# EAGLE board eib-64_panel (EAGLE 9.5.1), part 1 of 5
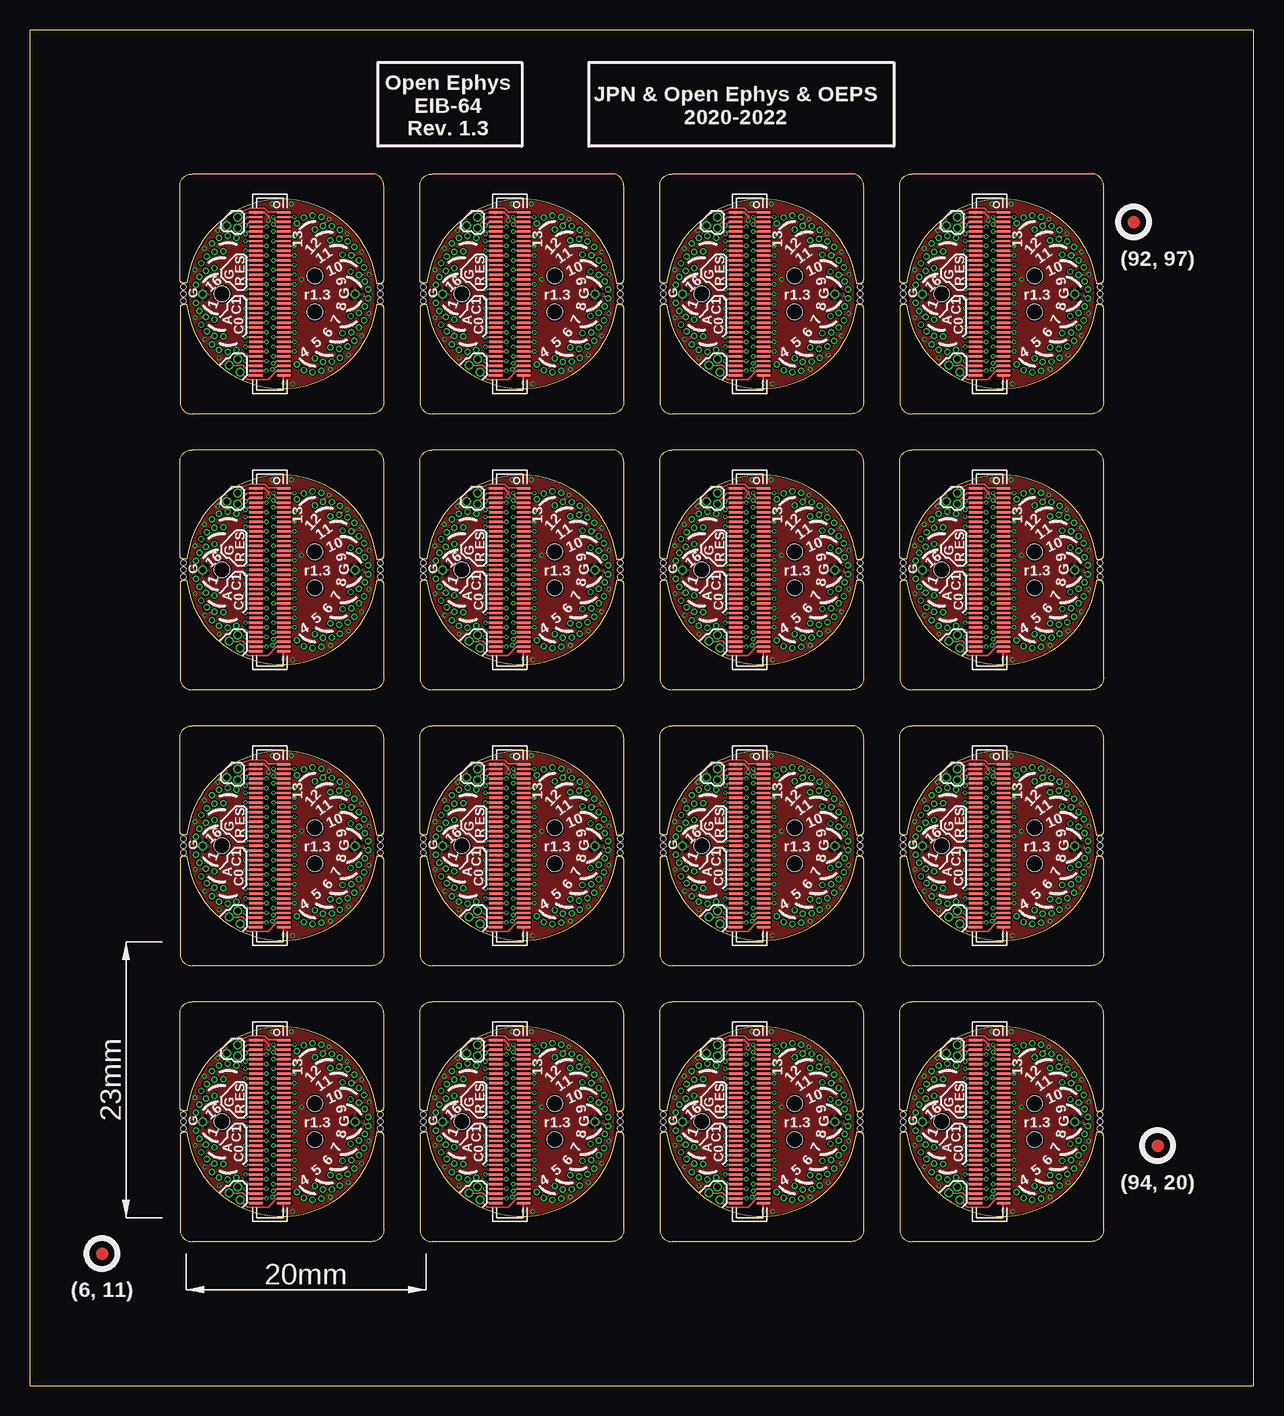
[diagram p0: board, top side]
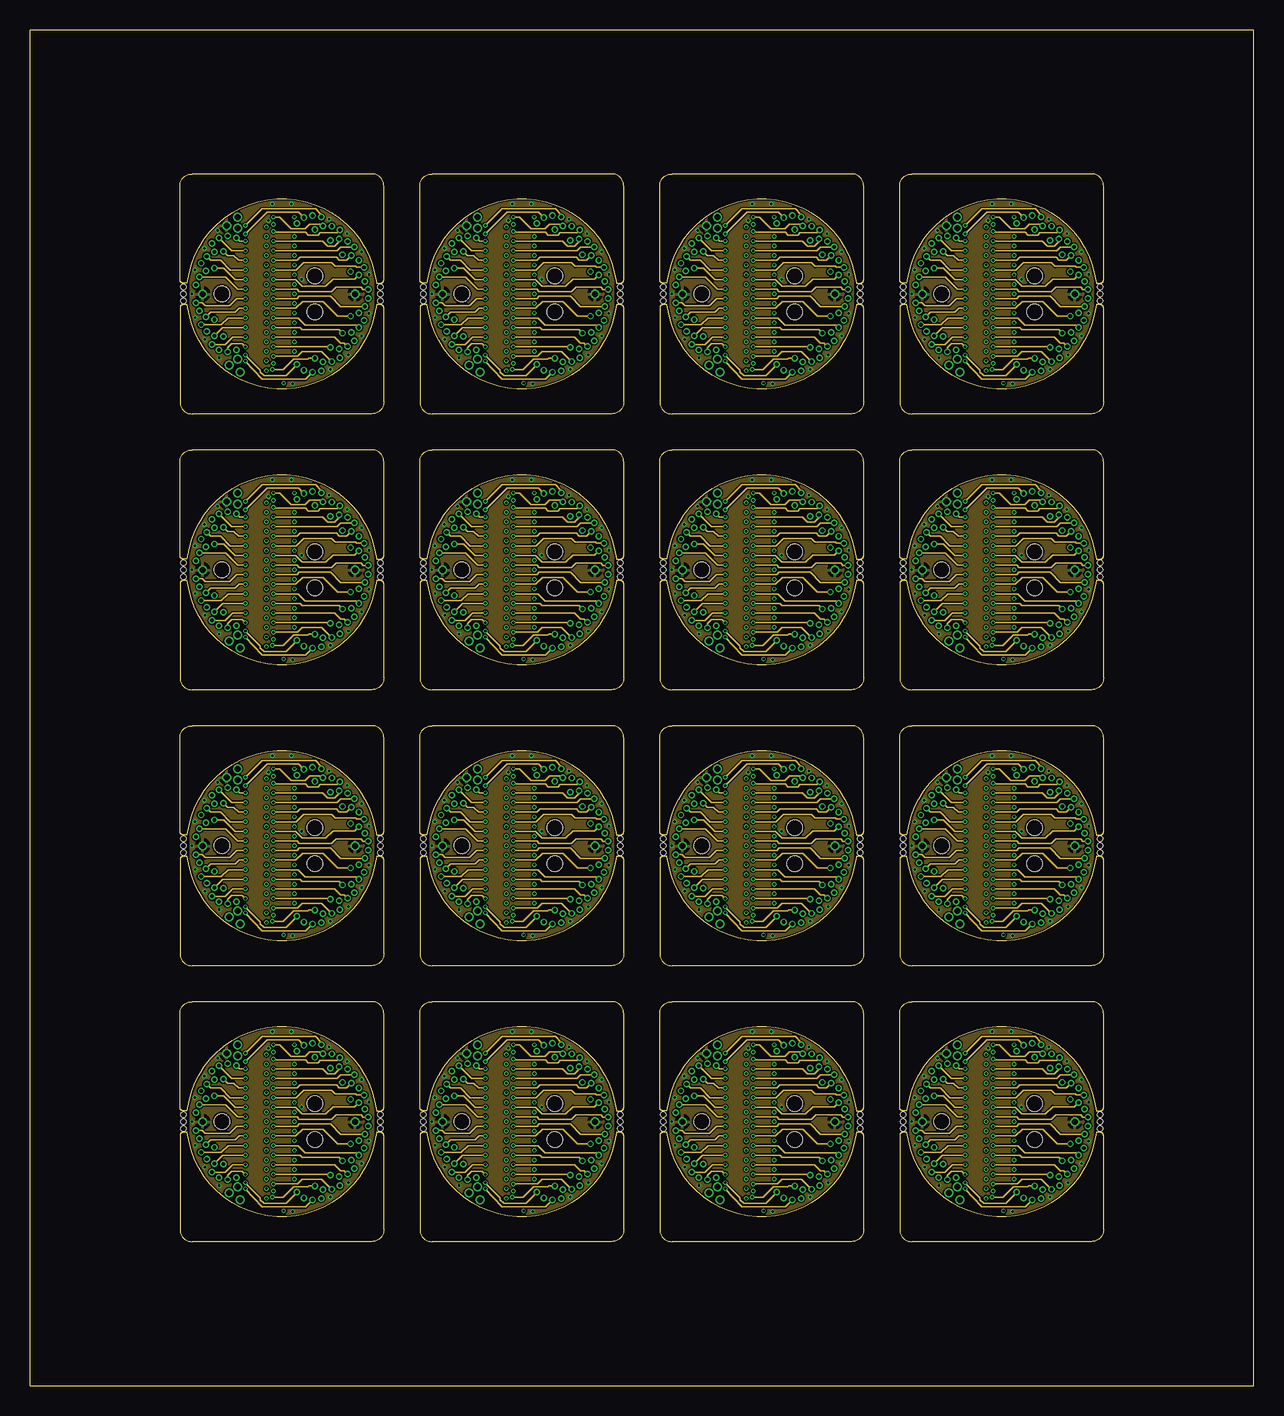
[diagram p1: board, inner layer Route2]
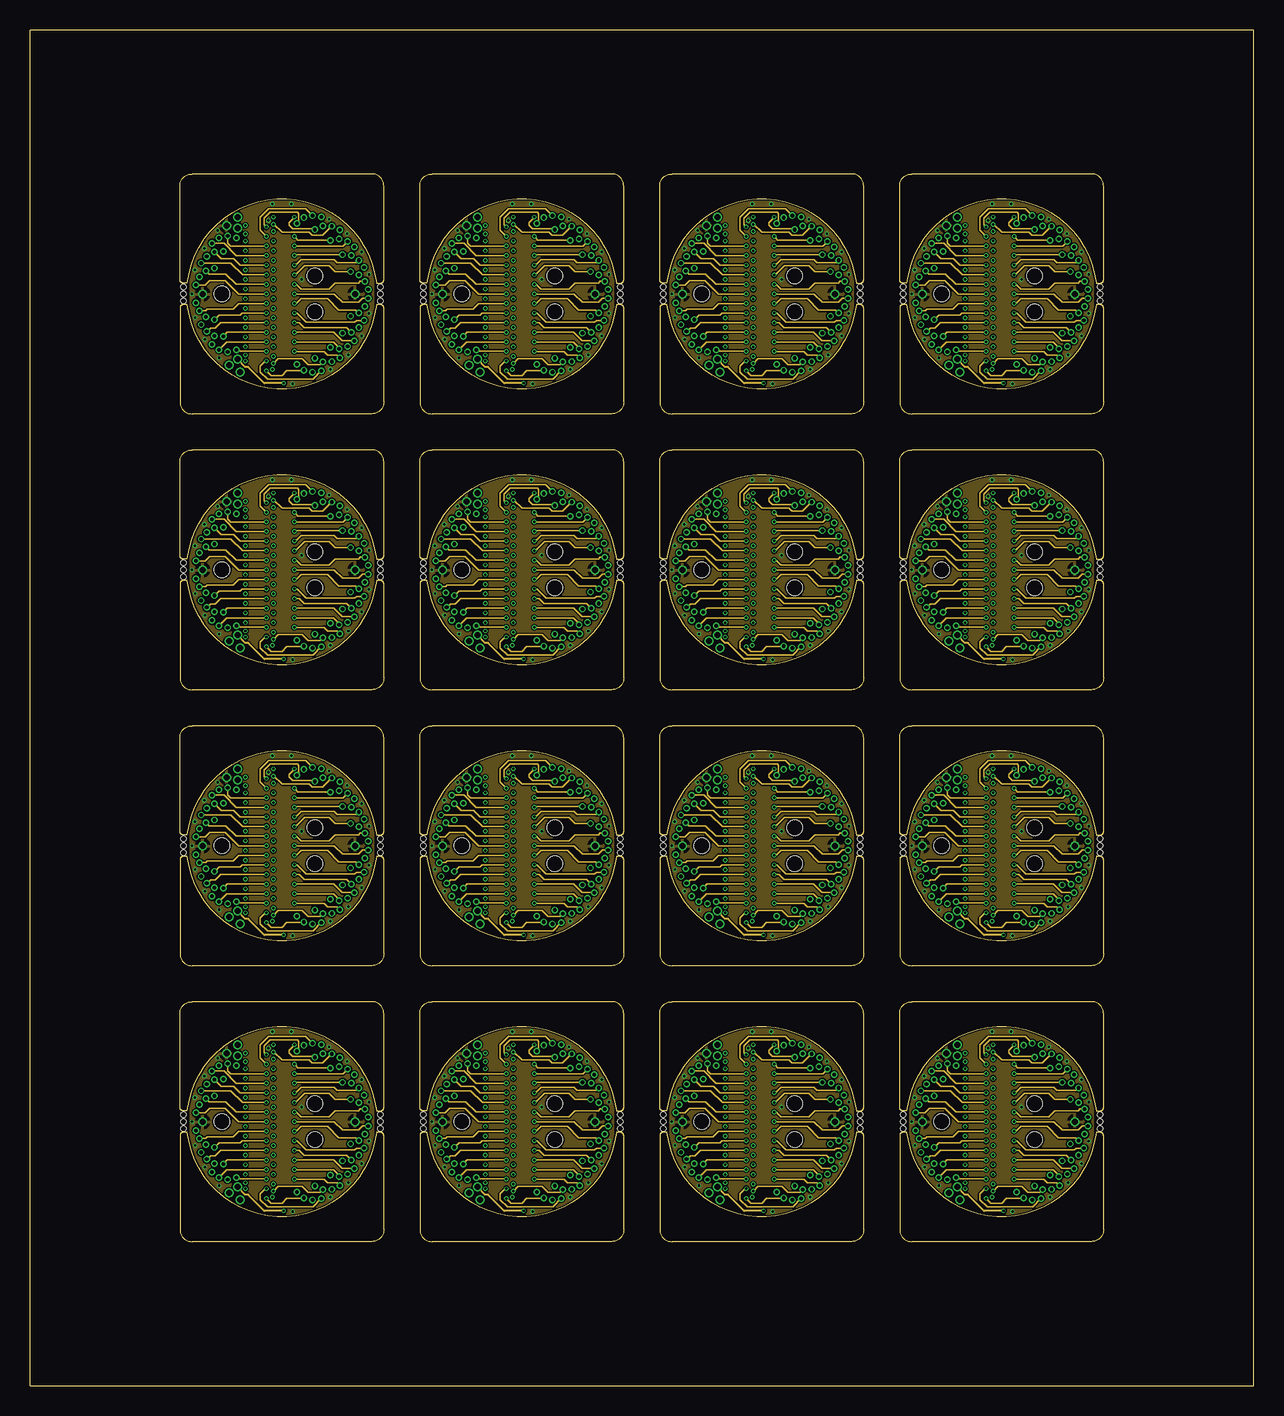
[diagram p2: board, inner layer Route15]
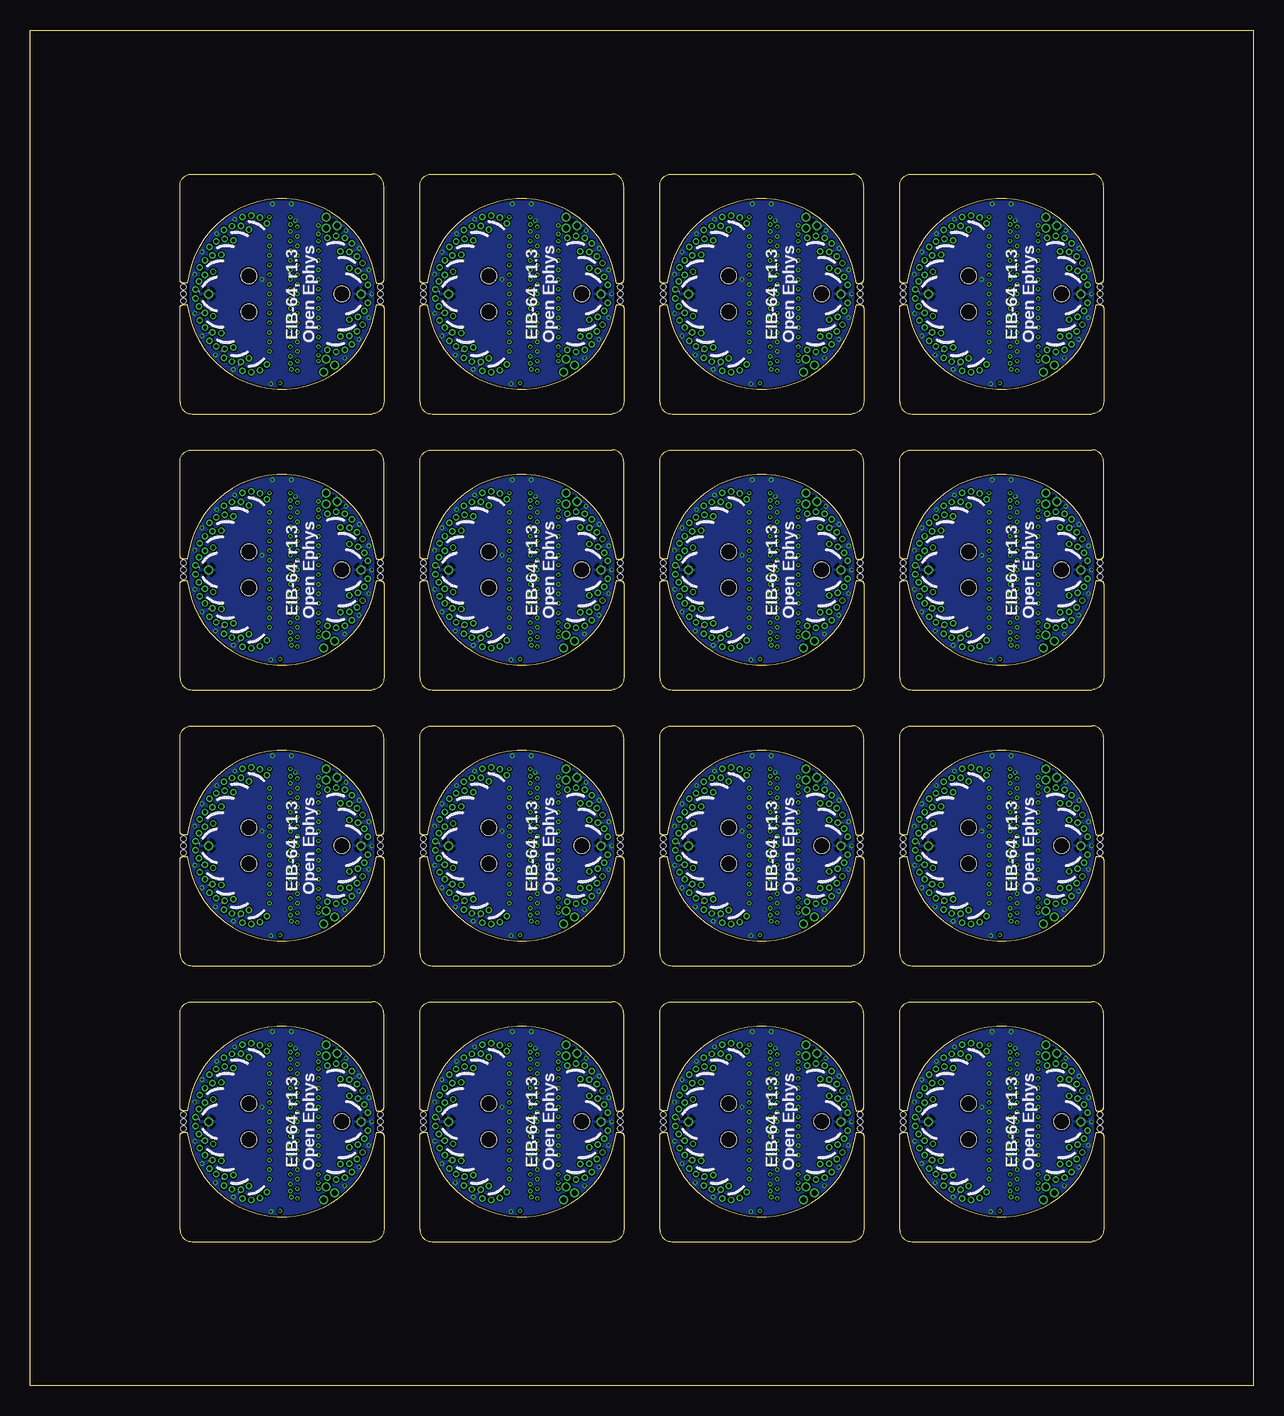
[diagram p3: board, bottom side, seen from below]

Size 102 x 113 mm. Coordinates in mm from the lower left corner, seen from the top.
Outline: 324 segments
Copper layers (1+2*15+16): Top 0.035mm / dielectric 1.5mm / Route2 0.035mm / dielectric 0.15mm / Route15 0.035mm / dielectric 0.2mm / Bottom 0.035mm
Design rules "pcb-cart-standard-4-layer *": minimum track width 3mil, minimum drill 6mil, track to track 4mil, track to pad 4mil, pad to pad 4mil, via to via 4mil, smd to smd 4mil, copper to edge 6mil, drill to drill 6mil, minimum pad ring 3mil, minimum via ring 3mil, stop-mask expansion 2mil, vias tented up to drill 20mil, thermal gap 10mil
Holes 0.45 mm at 12.8,22.6 12.8,22 12.8,21.4 29.2,21.4 29.2,22 29.2,22.6 32.8,22.6 32.8,22 32.8,21.4 49.2,21.4 49.2,22 49.2,22.6 52.8,22.6 52.8,22 52.8,21.4 69.2,21.4 69.2,22 69.2,22.6 72.8,22.6 72.8,22 72.8,21.4 89.2,21.4 89.2,22 89.2,22.6 32.8,45.6 32.8,45 32.8,44.4 49.2,44.4 49.2,45 49.2,45.6 52.8,45.6 52.8,45 52.8,44.4 69.2,44.4 69.2,45 69.2,45.6 72.8,45.6 72.8,45 72.8,44.4 89.2,44.4 89.2,45 89.2,45.6 32.8,68.6 32.8,68 32.8,67.4 49.2,67.4 49.2,68 49.2,68.6 52.8,68.6 52.8,68 52.8,67.4 69.2,67.4 69.2,68 69.2,68.6 72.8,68.6 72.8,68 72.8,67.4 89.2,67.4 89.2,68 89.2,68.6 32.8,91.6 32.8,91 32.8,90.4 49.2,90.4 49.2,91 49.2,91.6 52.8,91.6 52.8,91 52.8,90.4 69.2,90.4 69.2,91 69.2,91.6 72.8,91.6 72.8,91 72.8,90.4 89.2,90.4 89.2,91 89.2,91.6 12.8,45.6 12.8,45 12.8,44.4 29.2,44.4 29.2,45 29.2,45.6 12.8,68.6 12.8,68 12.8,67.4 29.2,67.4 29.2,68 29.2,68.6 12.8,91.6 12.8,91 12.8,90.4 29.2,90.4 29.2,91 29.2,91.6
Holes 1.3 mm at 23.75,20.5 23.75,23.5 16,22 43.75,20.5 43.75,23.5 36,22 63.75,20.5 63.75,23.5 56,22 83.75,20.5 83.75,23.5 76,22 43.75,43.5 43.75,46.5 36,45 63.75,43.5 63.75,46.5 56,45 83.75,43.5 83.75,46.5 76,45 43.75,66.5 43.75,69.5 36,68 63.75,66.5 63.75,69.5 56,68 83.75,66.5 83.75,69.5 76,68 43.75,89.5 43.75,92.5 36,91 63.75,89.5 63.75,92.5 56,91 83.75,89.5 83.75,92.5 76,91 23.75,43.5 23.75,46.5 16,45 23.75,66.5 23.75,69.5 16,68 23.75,89.5 23.75,92.5 16,91
tKeepout: area 13,14 to 29,30; area 33,14 to 49,30; area 53,14 to 69,30; area 73,14 to 89,30; area 33,37 to 49,53; area 53,37 to 69,53; area 73,37 to 89,53; area 33,60 to 49,76; area 53,60 to 69,76; area 73,60 to 89,76; area 33,83 to 49,99; area 53,83 to 69,99; 4 more areas

## Footprints (pad centres in the part's own frame; a part is rotated, then mirrored left to right if it is on the bottom)
GOLDPIN_0.5ID_0.7OD = drill 0.5 pad 0.7: P$1 0,0
DF40-70REC = smd 0.2 x 1.14: 1 -6.8,1.17; 2 -6.4,1.17; 3 -6,1.17; 4 -5.6,1.17; 5 -5.2,1.17; 6 -4.8,1.17; 7 -4.4,1.17; 8 -4,1.17; 9 -3.6,1.17; 10 -3.2,1.17; 11 -2.8,1.17; 12 -2.4,1.17; 13 -2,1.17; 14 -1.6,1.17; 15 -1.2,1.17; 16 -0.8,1.17; 17 -0.4,1.17; 18 0,1.17; 19 0.4,1.17; 20 0.8,1.17; 21 1.2,1.17; 22 1.6,1.17; 23 2,1.17; 24 2.4,1.17; 25 2.8,1.17; 26 3.2,1.17; 27 3.6,1.17; 28 4,1.17; 29 4.4,1.17; 30 4.8,1.17; 31 5.2,1.17; 32 5.6,1.17; 33 6,1.17; 34 6.4,1.17; 35 6.8,1.17; 36 6.8,-1.17; 37 6.4,-1.17; 38 6,-1.17; 39 5.6,-1.17; 40 5.2,-1.17; 41 4.8,-1.17; 42 4.4,-1.17; 43 4,-1.17; 44 3.6,-1.17; 45 3.2,-1.17; 46 2.8,-1.17; 47 2.4,-1.17; 48 2,-1.17; 49 1.6,-1.17; 50 1.2,-1.17; 51 0.8,-1.17; 52 0.4,-1.17; 53 0,-1.17; 54 -0.4,-1.17; 55 -0.8,-1.17; 56 -1.2,-1.17; 57 -1.6,-1.17; 58 -2,-1.17; 59 -2.4,-1.17; 60 -2.8,-1.17; 61 -3.2,-1.17; 62 -3.6,-1.17; 63 -4,-1.17; 64 -4.4,-1.17; 65 -4.8,-1.17; 66 -5.2,-1.17; 67 -5.6,-1.17; 68 -6,-1.17; 69 -6.4,-1.17; 70 -6.8,-1.17
TETRODE_0.3ID_LINEAR_MOUSE = drill 0.305 pad 0.533: 0 2,5.68; 1 1.76,6.38; 2 1.23,6.9; 3 0.55,7.18

## Placement (x,y rotation side)
AN  LRG_GP  [GOLDPIN_0.5ID_0.7OD]  16.6,16.05 90 top
AN1  LRG_GP  [GOLDPIN_0.5ID_0.7OD]  36.6,16.05 90 top
AN2  LRG_GP  [GOLDPIN_0.5ID_0.7OD]  56.6,16.05 90 top
AN3  LRG_GP  [GOLDPIN_0.5ID_0.7OD]  76.6,16.05 90 top
AN4  LRG_GP  [GOLDPIN_0.5ID_0.7OD]  16.6,39.05 90 top
AN5  LRG_GP  [GOLDPIN_0.5ID_0.7OD]  36.6,39.05 90 top
AN6  LRG_GP  [GOLDPIN_0.5ID_0.7OD]  56.6,39.05 90 top
AN7  LRG_GP  [GOLDPIN_0.5ID_0.7OD]  76.6,39.05 90 top
AN8  LRG_GP  [GOLDPIN_0.5ID_0.7OD]  16.6,62.05 90 top
AN9  LRG_GP  [GOLDPIN_0.5ID_0.7OD]  36.6,62.05 90 top
AN10  LRG_GP  [GOLDPIN_0.5ID_0.7OD]  56.6,62.05 90 top
AN11  LRG_GP  [GOLDPIN_0.5ID_0.7OD]  76.6,62.05 90 top
AN12  LRG_GP  [GOLDPIN_0.5ID_0.7OD]  16.6,85.05 90 top
AN13  LRG_GP  [GOLDPIN_0.5ID_0.7OD]  36.6,85.05 90 top
AN14  LRG_GP  [GOLDPIN_0.5ID_0.7OD]  56.6,85.05 90 top
AN15  LRG_GP  [GOLDPIN_0.5ID_0.7OD]  76.6,85.05 90 top
CAT0  LRG_GP  [GOLDPIN_0.5ID_0.7OD]  17.51,15.49 90 top
CAT1  LRG_GP  [GOLDPIN_0.5ID_0.7OD]  17.3,16.58 90 top
CAT2  LRG_GP  [GOLDPIN_0.5ID_0.7OD]  37.51,15.49 90 top
CAT3  LRG_GP  [GOLDPIN_0.5ID_0.7OD]  37.3,16.58 90 top
CAT4  LRG_GP  [GOLDPIN_0.5ID_0.7OD]  57.51,15.49 90 top
CAT5  LRG_GP  [GOLDPIN_0.5ID_0.7OD]  57.3,16.58 90 top
CAT6  LRG_GP  [GOLDPIN_0.5ID_0.7OD]  77.51,15.49 90 top
CAT7  LRG_GP  [GOLDPIN_0.5ID_0.7OD]  77.3,16.58 90 top
CAT8  LRG_GP  [GOLDPIN_0.5ID_0.7OD]  17.51,38.49 90 top
CAT9  LRG_GP  [GOLDPIN_0.5ID_0.7OD]  17.3,39.58 90 top
CAT10  LRG_GP  [GOLDPIN_0.5ID_0.7OD]  37.51,38.49 90 top
CAT11  LRG_GP  [GOLDPIN_0.5ID_0.7OD]  37.3,39.58 90 top
CAT12  LRG_GP  [GOLDPIN_0.5ID_0.7OD]  57.51,38.49 90 top
CAT13  LRG_GP  [GOLDPIN_0.5ID_0.7OD]  57.3,39.58 90 top
CAT14  LRG_GP  [GOLDPIN_0.5ID_0.7OD]  77.51,38.49 90 top
CAT15  LRG_GP  [GOLDPIN_0.5ID_0.7OD]  77.3,39.58 90 top
CAT16  LRG_GP  [GOLDPIN_0.5ID_0.7OD]  17.51,61.49 90 top
CAT17  LRG_GP  [GOLDPIN_0.5ID_0.7OD]  17.3,62.58 90 top
CAT18  LRG_GP  [GOLDPIN_0.5ID_0.7OD]  37.51,61.49 90 top
CAT19  LRG_GP  [GOLDPIN_0.5ID_0.7OD]  37.3,62.58 90 top
CAT20  LRG_GP  [GOLDPIN_0.5ID_0.7OD]  57.51,61.49 90 top
CAT21  LRG_GP  [GOLDPIN_0.5ID_0.7OD]  57.3,62.58 90 top
CAT22  LRG_GP  [GOLDPIN_0.5ID_0.7OD]  77.51,61.49 90 top
CAT23  LRG_GP  [GOLDPIN_0.5ID_0.7OD]  77.3,62.58 90 top
CAT24  LRG_GP  [GOLDPIN_0.5ID_0.7OD]  17.51,84.49 90 top
CAT25  LRG_GP  [GOLDPIN_0.5ID_0.7OD]  17.3,85.58 90 top
CAT26  LRG_GP  [GOLDPIN_0.5ID_0.7OD]  37.51,84.49 90 top
CAT27  LRG_GP  [GOLDPIN_0.5ID_0.7OD]  37.3,85.58 90 top
CAT28  LRG_GP  [GOLDPIN_0.5ID_0.7OD]  57.51,84.49 90 top
CAT29  LRG_GP  [GOLDPIN_0.5ID_0.7OD]  57.3,85.58 90 top
CAT30  LRG_GP  [GOLDPIN_0.5ID_0.7OD]  77.51,84.49 90 top
CAT31  LRG_GP  [GOLDPIN_0.5ID_0.7OD]  77.3,85.58 90 top
E$1  [FIDUCIAL]  94,20 0 top
E$2  [FIDUCIAL]  92,97 0 top
E$4  [FIDUCIAL]  6,11 0 top
ESTIM  LRG_GP  [GOLDPIN_0.5ID_0.7OD]  17.3,28.4 90 top
ESTIM1  LRG_GP  [GOLDPIN_0.5ID_0.7OD]  37.3,28.4 90 top
ESTIM2  LRG_GP  [GOLDPIN_0.5ID_0.7OD]  57.3,28.4 90 top
ESTIM3  LRG_GP  [GOLDPIN_0.5ID_0.7OD]  77.3,28.4 90 top
ESTIM4  LRG_GP  [GOLDPIN_0.5ID_0.7OD]  17.3,51.4 90 top
ESTIM5  LRG_GP  [GOLDPIN_0.5ID_0.7OD]  37.3,51.4 90 top
ESTIM6  LRG_GP  [GOLDPIN_0.5ID_0.7OD]  57.3,51.4 90 top
ESTIM7  LRG_GP  [GOLDPIN_0.5ID_0.7OD]  77.3,51.4 90 top
ESTIM8  LRG_GP  [GOLDPIN_0.5ID_0.7OD]  17.3,74.4 90 top
ESTIM9  LRG_GP  [GOLDPIN_0.5ID_0.7OD]  37.3,74.4 90 top
ESTIM10  LRG_GP  [GOLDPIN_0.5ID_0.7OD]  57.3,74.4 90 top
ESTIM11  LRG_GP  [GOLDPIN_0.5ID_0.7OD]  77.3,74.4 90 top
ESTIM12  LRG_GP  [GOLDPIN_0.5ID_0.7OD]  17.3,97.4 90 top
ESTIM13  LRG_GP  [GOLDPIN_0.5ID_0.7OD]  37.3,97.4 90 top
ESTIM14  LRG_GP  [GOLDPIN_0.5ID_0.7OD]  57.3,97.4 90 top
ESTIM15  LRG_GP  [GOLDPIN_0.5ID_0.7OD]  77.3,97.4 90 top
GND0  LRG_GP  [GOLDPIN_0.5ID_0.7OD]  14.4,22 90 top
GND1  LRG_GP  [GOLDPIN_0.5ID_0.7OD]  27.1,22 90 top
GND2  LRG_GP  [GOLDPIN_0.5ID_0.7OD]  34.4,22 90 top
GND3  LRG_GP  [GOLDPIN_0.5ID_0.7OD]  47.1,22 90 top
GND4  LRG_GP  [GOLDPIN_0.5ID_0.7OD]  54.4,22 90 top
GND5  LRG_GP  [GOLDPIN_0.5ID_0.7OD]  67.1,22 90 top
GND6  LRG_GP  [GOLDPIN_0.5ID_0.7OD]  74.4,22 90 top
GND7  LRG_GP  [GOLDPIN_0.5ID_0.7OD]  87.1,22 90 top
GND8  LRG_GP  [GOLDPIN_0.5ID_0.7OD]  14.4,45 90 top
GND9  LRG_GP  [GOLDPIN_0.5ID_0.7OD]  27.1,45 90 top
GND10  LRG_GP  [GOLDPIN_0.5ID_0.7OD]  34.4,45 90 top
GND11  LRG_GP  [GOLDPIN_0.5ID_0.7OD]  47.1,45 90 top
GND12  LRG_GP  [GOLDPIN_0.5ID_0.7OD]  54.4,45 90 top
GND13  LRG_GP  [GOLDPIN_0.5ID_0.7OD]  67.1,45 90 top
GND14  LRG_GP  [GOLDPIN_0.5ID_0.7OD]  74.4,45 90 top
GND15  LRG_GP  [GOLDPIN_0.5ID_0.7OD]  87.1,45 90 top
GND16  LRG_GP  [GOLDPIN_0.5ID_0.7OD]  14.4,68 90 top
GND17  LRG_GP  [GOLDPIN_0.5ID_0.7OD]  27.1,68 90 top
GND18  LRG_GP  [GOLDPIN_0.5ID_0.7OD]  34.4,68 90 top
GND19  LRG_GP  [GOLDPIN_0.5ID_0.7OD]  47.1,68 90 top
GND20  LRG_GP  [GOLDPIN_0.5ID_0.7OD]  54.4,68 90 top
GND21  LRG_GP  [GOLDPIN_0.5ID_0.7OD]  67.1,68 90 top
GND22  LRG_GP  [GOLDPIN_0.5ID_0.7OD]  74.4,68 90 top
GND23  LRG_GP  [GOLDPIN_0.5ID_0.7OD]  87.1,68 90 top
GND24  LRG_GP  [GOLDPIN_0.5ID_0.7OD]  14.4,91 90 top
GND25  LRG_GP  [GOLDPIN_0.5ID_0.7OD]  27.1,91 90 top
GND26  LRG_GP  [GOLDPIN_0.5ID_0.7OD]  34.4,91 90 top
GND27  LRG_GP  [GOLDPIN_0.5ID_0.7OD]  47.1,91 90 top
GND28  LRG_GP  [GOLDPIN_0.5ID_0.7OD]  54.4,91 90 top
GND29  LRG_GP  [GOLDPIN_0.5ID_0.7OD]  67.1,91 90 top
GND30  LRG_GP  [GOLDPIN_0.5ID_0.7OD]  74.4,91 90 top
GND31  LRG_GP  [GOLDPIN_0.5ID_0.7OD]  87.1,91 90 top
J1  DF40-REC  [DF40-70REC]  20,22 270 top
J2  DF40-REC  [DF40-70REC]  40,22 270 top
J3  DF40-REC  [DF40-70REC]  60,22 270 top
J4  DF40-REC  [DF40-70REC]  80,22 270 top
J5  DF40-REC  [DF40-70REC]  20,45 270 top
J6  DF40-REC  [DF40-70REC]  40,45 270 top
J7  DF40-REC  [DF40-70REC]  60,45 270 top
J8  DF40-REC  [DF40-70REC]  80,45 270 top
J9  DF40-REC  [DF40-70REC]  20,68 270 top
J10  DF40-REC  [DF40-70REC]  40,68 270 top
J11  DF40-REC  [DF40-70REC]  60,68 270 top
J12  DF40-REC  [DF40-70REC]  80,68 270 top
J13  DF40-REC  [DF40-70REC]  20,91 270 top
J14  DF40-REC  [DF40-70REC]  40,91 270 top
J15  DF40-REC  [DF40-70REC]  60,91 270 top
J16  DF40-REC  [DF40-70REC]  80,91 270 top
REF  LRG_GP  [GOLDPIN_0.5ID_0.7OD]  17.3,27.5 90 top
REF1  LRG_GP  [GOLDPIN_0.5ID_0.7OD]  37.3,27.5 90 top
REF2  LRG_GP  [GOLDPIN_0.5ID_0.7OD]  57.3,27.5 90 top
REF3  LRG_GP  [GOLDPIN_0.5ID_0.7OD]  77.3,27.5 90 top
REF4  LRG_GP  [GOLDPIN_0.5ID_0.7OD]  17.3,50.5 90 top
REF5  LRG_GP  [GOLDPIN_0.5ID_0.7OD]  37.3,50.5 90 top
REF6  LRG_GP  [GOLDPIN_0.5ID_0.7OD]  57.3,50.5 90 top
REF7  LRG_GP  [GOLDPIN_0.5ID_0.7OD]  77.3,50.5 90 top
REF8  LRG_GP  [GOLDPIN_0.5ID_0.7OD]  17.3,73.5 90 top
REF9  LRG_GP  [GOLDPIN_0.5ID_0.7OD]  37.3,73.5 90 top
REF10  LRG_GP  [GOLDPIN_0.5ID_0.7OD]  57.3,73.5 90 top
REF11  LRG_GP  [GOLDPIN_0.5ID_0.7OD]  77.3,73.5 90 top
REF12  LRG_GP  [GOLDPIN_0.5ID_0.7OD]  17.3,96.5 90 top
REF13  LRG_GP  [GOLDPIN_0.5ID_0.7OD]  37.3,96.5 90 top
REF14  LRG_GP  [GOLDPIN_0.5ID_0.7OD]  57.3,96.5 90 top
REF15  LRG_GP  [GOLDPIN_0.5ID_0.7OD]  77.3,96.5 90 top
SHLD_A  LRG_GP  [GOLDPIN_0.5ID_0.7OD]  16.4,27.7 90 top
SHLD_A1  LRG_GP  [GOLDPIN_0.5ID_0.7OD]  36.4,27.7 90 top
SHLD_A2  LRG_GP  [GOLDPIN_0.5ID_0.7OD]  56.4,27.7 90 top
SHLD_A3  LRG_GP  [GOLDPIN_0.5ID_0.7OD]  76.4,27.7 90 top
SHLD_A4  LRG_GP  [GOLDPIN_0.5ID_0.7OD]  16.4,50.7 90 top
SHLD_A5  LRG_GP  [GOLDPIN_0.5ID_0.7OD]  36.4,50.7 90 top
SHLD_A6  LRG_GP  [GOLDPIN_0.5ID_0.7OD]  56.4,50.7 90 top
SHLD_A7  LRG_GP  [GOLDPIN_0.5ID_0.7OD]  76.4,50.7 90 top
SHLD_A8  LRG_GP  [GOLDPIN_0.5ID_0.7OD]  16.4,73.7 90 top
SHLD_A9  LRG_GP  [GOLDPIN_0.5ID_0.7OD]  36.4,73.7 90 top
SHLD_A10  LRG_GP  [GOLDPIN_0.5ID_0.7OD]  56.4,73.7 90 top
SHLD_A11  LRG_GP  [GOLDPIN_0.5ID_0.7OD]  76.4,73.7 90 top
SHLD_A12  LRG_GP  [GOLDPIN_0.5ID_0.7OD]  16.4,96.7 90 top
SHLD_A13  LRG_GP  [GOLDPIN_0.5ID_0.7OD]  36.4,96.7 90 top
SHLD_A14  LRG_GP  [GOLDPIN_0.5ID_0.7OD]  56.4,96.7 90 top
SHLD_A15  LRG_GP  [GOLDPIN_0.5ID_0.7OD]  76.4,96.7 90 top
TET0  0  [TETRODE_0.3ID_LINEAR_MOUSE]  21,22 268.5 bottom
TET1  1  [TETRODE_0.3ID_LINEAR_MOUSE]  21,22 253.5 bottom
TET2  2  [TETRODE_0.3ID_LINEAR_MOUSE]  21,22 238.5 bottom
TET3  3  [TETRODE_0.3ID_LINEAR_MOUSE]  21,22 211.5 top
TET4  4  [TETRODE_0.3ID_LINEAR_MOUSE]  21,22 226.5 top
TET5  5  [TETRODE_0.3ID_LINEAR_MOUSE]  21,22 241.5 top
TET6  6  [TETRODE_0.3ID_LINEAR_MOUSE]  21,22 256.5 top
TET7  7  [TETRODE_0.3ID_LINEAR_MOUSE]  21,22 271.5 top
TET8  8  [TETRODE_0.3ID_LINEAR_MOUSE]  21,22 91.5 bottom
TET9  9  [TETRODE_0.3ID_LINEAR_MOUSE]  21,22 76.5 bottom
TET10  10  [TETRODE_0.3ID_LINEAR_MOUSE]  21,22 61.5 bottom
TET11  11  [TETRODE_0.3ID_LINEAR_MOUSE]  21,22 46.5 bottom
TET12  12  [TETRODE_0.3ID_LINEAR_MOUSE]  21,22 31.5 bottom
TET13  13  [TETRODE_0.3ID_LINEAR_MOUSE]  21,22 58.5 top
TET14  14  [TETRODE_0.3ID_LINEAR_MOUSE]  21,22 73.5 top
TET15  15  [TETRODE_0.3ID_LINEAR_MOUSE]  21,22 88.5 top
TET16  0  [TETRODE_0.3ID_LINEAR_MOUSE]  41,22 268.5 bottom
TET17  1  [TETRODE_0.3ID_LINEAR_MOUSE]  41,22 253.5 bottom
TET18  2  [TETRODE_0.3ID_LINEAR_MOUSE]  41,22 238.5 bottom
TET19  3  [TETRODE_0.3ID_LINEAR_MOUSE]  41,22 211.5 top
TET20  4  [TETRODE_0.3ID_LINEAR_MOUSE]  41,22 226.5 top
TET21  5  [TETRODE_0.3ID_LINEAR_MOUSE]  41,22 241.5 top
TET22  6  [TETRODE_0.3ID_LINEAR_MOUSE]  41,22 256.5 top
TET23  7  [TETRODE_0.3ID_LINEAR_MOUSE]  41,22 271.5 top
TET24  15  [TETRODE_0.3ID_LINEAR_MOUSE]  41,22 88.5 top
TET25  14  [TETRODE_0.3ID_LINEAR_MOUSE]  41,22 73.5 top
TET26  13  [TETRODE_0.3ID_LINEAR_MOUSE]  41,22 58.5 top
TET27  12  [TETRODE_0.3ID_LINEAR_MOUSE]  41,22 31.5 bottom
TET28  11  [TETRODE_0.3ID_LINEAR_MOUSE]  41,22 46.5 bottom
TET29  10  [TETRODE_0.3ID_LINEAR_MOUSE]  41,22 61.5 bottom
TET30  9  [TETRODE_0.3ID_LINEAR_MOUSE]  41,22 76.5 bottom
TET31  8  [TETRODE_0.3ID_LINEAR_MOUSE]  41,22 91.5 bottom
TET32  0  [TETRODE_0.3ID_LINEAR_MOUSE]  61,22 268.5 bottom
TET33  1  [TETRODE_0.3ID_LINEAR_MOUSE]  61,22 253.5 bottom
TET34  2  [TETRODE_0.3ID_LINEAR_MOUSE]  61,22 238.5 bottom
TET35  3  [TETRODE_0.3ID_LINEAR_MOUSE]  61,22 211.5 top
TET36  4  [TETRODE_0.3ID_LINEAR_MOUSE]  61,22 226.5 top
TET37  5  [TETRODE_0.3ID_LINEAR_MOUSE]  61,22 241.5 top
TET38  6  [TETRODE_0.3ID_LINEAR_MOUSE]  61,22 256.5 top
TET39  7  [TETRODE_0.3ID_LINEAR_MOUSE]  61,22 271.5 top
TET40  15  [TETRODE_0.3ID_LINEAR_MOUSE]  61,22 88.5 top
TET41  14  [TETRODE_0.3ID_LINEAR_MOUSE]  61,22 73.5 top
TET42  13  [TETRODE_0.3ID_LINEAR_MOUSE]  61,22 58.5 top
TET43  12  [TETRODE_0.3ID_LINEAR_MOUSE]  61,22 31.5 bottom
TET44  11  [TETRODE_0.3ID_LINEAR_MOUSE]  61,22 46.5 bottom
TET45  10  [TETRODE_0.3ID_LINEAR_MOUSE]  61,22 61.5 bottom
TET46  9  [TETRODE_0.3ID_LINEAR_MOUSE]  61,22 76.5 bottom
TET47  8  [TETRODE_0.3ID_LINEAR_MOUSE]  61,22 91.5 bottom
TET48  0  [TETRODE_0.3ID_LINEAR_MOUSE]  81,22 268.5 bottom
TET49  1  [TETRODE_0.3ID_LINEAR_MOUSE]  81,22 253.5 bottom
TET50  2  [TETRODE_0.3ID_LINEAR_MOUSE]  81,22 238.5 bottom
TET51  3  [TETRODE_0.3ID_LINEAR_MOUSE]  81,22 211.5 top
TET52  4  [TETRODE_0.3ID_LINEAR_MOUSE]  81,22 226.5 top
TET53  5  [TETRODE_0.3ID_LINEAR_MOUSE]  81,22 241.5 top
TET54  6  [TETRODE_0.3ID_LINEAR_MOUSE]  81,22 256.5 top
TET55  7  [TETRODE_0.3ID_LINEAR_MOUSE]  81,22 271.5 top
TET56  15  [TETRODE_0.3ID_LINEAR_MOUSE]  81,22 88.5 top
TET57  14  [TETRODE_0.3ID_LINEAR_MOUSE]  81,22 73.5 top
TET58  13  [TETRODE_0.3ID_LINEAR_MOUSE]  81,22 58.5 top
TET59  12  [TETRODE_0.3ID_LINEAR_MOUSE]  81,22 31.5 bottom
TET60  11  [TETRODE_0.3ID_LINEAR_MOUSE]  81,22 46.5 bottom
TET61  10  [TETRODE_0.3ID_LINEAR_MOUSE]  81,22 61.5 bottom
TET62  9  [TETRODE_0.3ID_LINEAR_MOUSE]  81,22 76.5 bottom
TET63  8  [TETRODE_0.3ID_LINEAR_MOUSE]  81,22 91.5 bottom
TET64  0  [TETRODE_0.3ID_LINEAR_MOUSE]  21,45 268.5 bottom
TET65  1  [TETRODE_0.3ID_LINEAR_MOUSE]  21,45 253.5 bottom
TET66  2  [TETRODE_0.3ID_LINEAR_MOUSE]  21,45 238.5 bottom
TET67  3  [TETRODE_0.3ID_LINEAR_MOUSE]  21,45 211.5 top
TET68  4  [TETRODE_0.3ID_LINEAR_MOUSE]  21,45 226.5 top
TET69  5  [TETRODE_0.3ID_LINEAR_MOUSE]  21,45 241.5 top
TET70  6  [TETRODE_0.3ID_LINEAR_MOUSE]  21,45 256.5 top
TET71  7  [TETRODE_0.3ID_LINEAR_MOUSE]  21,45 271.5 top
TET72  15  [TETRODE_0.3ID_LINEAR_MOUSE]  21,45 88.5 top
TET73  14  [TETRODE_0.3ID_LINEAR_MOUSE]  21,45 73.5 top
TET74  13  [TETRODE_0.3ID_LINEAR_MOUSE]  21,45 58.5 top
TET75  12  [TETRODE_0.3ID_LINEAR_MOUSE]  21,45 31.5 bottom
TET76  11  [TETRODE_0.3ID_LINEAR_MOUSE]  21,45 46.5 bottom
TET77  10  [TETRODE_0.3ID_LINEAR_MOUSE]  21,45 61.5 bottom
TET78  9  [TETRODE_0.3ID_LINEAR_MOUSE]  21,45 76.5 bottom
TET79  8  [TETRODE_0.3ID_LINEAR_MOUSE]  21,45 91.5 bottom
TET80  0  [TETRODE_0.3ID_LINEAR_MOUSE]  41,45 268.5 bottom
TET81  1  [TETRODE_0.3ID_LINEAR_MOUSE]  41,45 253.5 bottom
TET82  2  [TETRODE_0.3ID_LINEAR_MOUSE]  41,45 238.5 bottom
TET83  3  [TETRODE_0.3ID_LINEAR_MOUSE]  41,45 211.5 top
TET84  4  [TETRODE_0.3ID_LINEAR_MOUSE]  41,45 226.5 top
TET85  5  [TETRODE_0.3ID_LINEAR_MOUSE]  41,45 241.5 top
TET86  6  [TETRODE_0.3ID_LINEAR_MOUSE]  41,45 256.5 top
TET87  7  [TETRODE_0.3ID_LINEAR_MOUSE]  41,45 271.5 top
TET88  15  [TETRODE_0.3ID_LINEAR_MOUSE]  41,45 88.5 top
TET89  14  [TETRODE_0.3ID_LINEAR_MOUSE]  41,45 73.5 top
TET90  13  [TETRODE_0.3ID_LINEAR_MOUSE]  41,45 58.5 top
TET91  12  [TETRODE_0.3ID_LINEAR_MOUSE]  41,45 31.5 bottom
TET92  11  [TETRODE_0.3ID_LINEAR_MOUSE]  41,45 46.5 bottom
TET93  10  [TETRODE_0.3ID_LINEAR_MOUSE]  41,45 61.5 bottom
TET94  9  [TETRODE_0.3ID_LINEAR_MOUSE]  41,45 76.5 bottom
TET95  8  [TETRODE_0.3ID_LINEAR_MOUSE]  41,45 91.5 bottom
TET96  0  [TETRODE_0.3ID_LINEAR_MOUSE]  61,45 268.5 bottom
TET97  1  [TETRODE_0.3ID_LINEAR_MOUSE]  61,45 253.5 bottom
TET98  2  [TETRODE_0.3ID_LINEAR_MOUSE]  61,45 238.5 bottom
TET99  3  [TETRODE_0.3ID_LINEAR_MOUSE]  61,45 211.5 top
TET100  4  [TETRODE_0.3ID_LINEAR_MOUSE]  61,45 226.5 top
TET101  5  [TETRODE_0.3ID_LINEAR_MOUSE]  61,45 241.5 top
TET102  6  [TETRODE_0.3ID_LINEAR_MOUSE]  61,45 256.5 top
TET103  7  [TETRODE_0.3ID_LINEAR_MOUSE]  61,45 271.5 top
TET104  15  [TETRODE_0.3ID_LINEAR_MOUSE]  61,45 88.5 top
TET105  14  [TETRODE_0.3ID_LINEAR_MOUSE]  61,45 73.5 top
TET106  13  [TETRODE_0.3ID_LINEAR_MOUSE]  61,45 58.5 top
TET107  12  [TETRODE_0.3ID_LINEAR_MOUSE]  61,45 31.5 bottom
TET108  11  [TETRODE_0.3ID_LINEAR_MOUSE]  61,45 46.5 bottom
TET109  10  [TETRODE_0.3ID_LINEAR_MOUSE]  61,45 61.5 bottom
TET110  9  [TETRODE_0.3ID_LINEAR_MOUSE]  61,45 76.5 bottom
TET111  8  [TETRODE_0.3ID_LINEAR_MOUSE]  61,45 91.5 bottom
TET112  0  [TETRODE_0.3ID_LINEAR_MOUSE]  81,45 268.5 bottom
TET113  1  [TETRODE_0.3ID_LINEAR_MOUSE]  81,45 253.5 bottom
TET114  2  [TETRODE_0.3ID_LINEAR_MOUSE]  81,45 238.5 bottom
TET115  3  [TETRODE_0.3ID_LINEAR_MOUSE]  81,45 211.5 top
TET116  4  [TETRODE_0.3ID_LINEAR_MOUSE]  81,45 226.5 top
TET117  5  [TETRODE_0.3ID_LINEAR_MOUSE]  81,45 241.5 top
TET118  6  [TETRODE_0.3ID_LINEAR_MOUSE]  81,45 256.5 top
TET119  7  [TETRODE_0.3ID_LINEAR_MOUSE]  81,45 271.5 top
TET120  15  [TETRODE_0.3ID_LINEAR_MOUSE]  81,45 88.5 top
TET121  14  [TETRODE_0.3ID_LINEAR_MOUSE]  81,45 73.5 top
TET122  13  [TETRODE_0.3ID_LINEAR_MOUSE]  81,45 58.5 top
TET123  12  [TETRODE_0.3ID_LINEAR_MOUSE]  81,45 31.5 bottom
TET124  11  [TETRODE_0.3ID_LINEAR_MOUSE]  81,45 46.5 bottom
TET125  10  [TETRODE_0.3ID_LINEAR_MOUSE]  81,45 61.5 bottom
TET126  9  [TETRODE_0.3ID_LINEAR_MOUSE]  81,45 76.5 bottom
TET127  8  [TETRODE_0.3ID_LINEAR_MOUSE]  81,45 91.5 bottom
TET128  0  [TETRODE_0.3ID_LINEAR_MOUSE]  21,68 268.5 bottom
TET129  1  [TETRODE_0.3ID_LINEAR_MOUSE]  21,68 253.5 bottom
TET130  2  [TETRODE_0.3ID_LINEAR_MOUSE]  21,68 238.5 bottom
TET131  3  [TETRODE_0.3ID_LINEAR_MOUSE]  21,68 211.5 top
TET132  4  [TETRODE_0.3ID_LINEAR_MOUSE]  21,68 226.5 top
TET133  5  [TETRODE_0.3ID_LINEAR_MOUSE]  21,68 241.5 top
TET134  6  [TETRODE_0.3ID_LINEAR_MOUSE]  21,68 256.5 top
TET135  7  [TETRODE_0.3ID_LINEAR_MOUSE]  21,68 271.5 top
TET136  15  [TETRODE_0.3ID_LINEAR_MOUSE]  21,68 88.5 top
TET137  14  [TETRODE_0.3ID_LINEAR_MOUSE]  21,68 73.5 top
TET138  13  [TETRODE_0.3ID_LINEAR_MOUSE]  21,68 58.5 top
TET139  12  [TETRODE_0.3ID_LINEAR_MOUSE]  21,68 31.5 bottom
TET140  11  [TETRODE_0.3ID_LINEAR_MOUSE]  21,68 46.5 bottom
TET141  10  [TETRODE_0.3ID_LINEAR_MOUSE]  21,68 61.5 bottom
TET142  9  [TETRODE_0.3ID_LINEAR_MOUSE]  21,68 76.5 bottom
TET143  8  [TETRODE_0.3ID_LINEAR_MOUSE]  21,68 91.5 bottom
TET144  0  [TETRODE_0.3ID_LINEAR_MOUSE]  41,68 268.5 bottom
TET145  1  [TETRODE_0.3ID_LINEAR_MOUSE]  41,68 253.5 bottom
TET146  2  [TETRODE_0.3ID_LINEAR_MOUSE]  41,68 238.5 bottom
TET147  3  [TETRODE_0.3ID_LINEAR_MOUSE]  41,68 211.5 top
TET148  4  [TETRODE_0.3ID_LINEAR_MOUSE]  41,68 226.5 top
TET149  5  [TETRODE_0.3ID_LINEAR_MOUSE]  41,68 241.5 top
TET150  6  [TETRODE_0.3ID_LINEAR_MOUSE]  41,68 256.5 top
TET151  7  [TETRODE_0.3ID_LINEAR_MOUSE]  41,68 271.5 top
TET152  15  [TETRODE_0.3ID_LINEAR_MOUSE]  41,68 88.5 top
TET153  14  [TETRODE_0.3ID_LINEAR_MOUSE]  41,68 73.5 top
TET154  13  [TETRODE_0.3ID_LINEAR_MOUSE]  41,68 58.5 top
TET155  12  [TETRODE_0.3ID_LINEAR_MOUSE]  41,68 31.5 bottom
TET156  11  [TETRODE_0.3ID_LINEAR_MOUSE]  41,68 46.5 bottom
TET157  10  [TETRODE_0.3ID_LINEAR_MOUSE]  41,68 61.5 bottom
TET158  9  [TETRODE_0.3ID_LINEAR_MOUSE]  41,68 76.5 bottom
TET159  8  [TETRODE_0.3ID_LINEAR_MOUSE]  41,68 91.5 bottom
TET160  0  [TETRODE_0.3ID_LINEAR_MOUSE]  61,68 268.5 bottom
TET161  1  [TETRODE_0.3ID_LINEAR_MOUSE]  61,68 253.5 bottom
TET162  2  [TETRODE_0.3ID_LINEAR_MOUSE]  61,68 238.5 bottom
TET163  3  [TETRODE_0.3ID_LINEAR_MOUSE]  61,68 211.5 top
TET164  4  [TETRODE_0.3ID_LINEAR_MOUSE]  61,68 226.5 top
TET165  5  [TETRODE_0.3ID_LINEAR_MOUSE]  61,68 241.5 top
TET166  6  [TETRODE_0.3ID_LINEAR_MOUSE]  61,68 256.5 top
TET167  7  [TETRODE_0.3ID_LINEAR_MOUSE]  61,68 271.5 top
TET168  15  [TETRODE_0.3ID_LINEAR_MOUSE]  61,68 88.5 top
TET169  14  [TETRODE_0.3ID_LINEAR_MOUSE]  61,68 73.5 top
TET170  13  [TETRODE_0.3ID_LINEAR_MOUSE]  61,68 58.5 top
TET171  12  [TETRODE_0.3ID_LINEAR_MOUSE]  61,68 31.5 bottom
TET172  11  [TETRODE_0.3ID_LINEAR_MOUSE]  61,68 46.5 bottom
TET173  10  [TETRODE_0.3ID_LINEAR_MOUSE]  61,68 61.5 bottom
TET174  9  [TETRODE_0.3ID_LINEAR_MOUSE]  61,68 76.5 bottom
TET175  8  [TETRODE_0.3ID_LINEAR_MOUSE]  61,68 91.5 bottom
TET176  0  [TETRODE_0.3ID_LINEAR_MOUSE]  81,68 268.5 bottom
TET177  1  [TETRODE_0.3ID_LINEAR_MOUSE]  81,68 253.5 bottom
TET178  2  [TETRODE_0.3ID_LINEAR_MOUSE]  81,68 238.5 bottom
TET179  3  [TETRODE_0.3ID_LINEAR_MOUSE]  81,68 211.5 top
TET180  4  [TETRODE_0.3ID_LINEAR_MOUSE]  81,68 226.5 top
TET181  5  [TETRODE_0.3ID_LINEAR_MOUSE]  81,68 241.5 top
TET182  6  [TETRODE_0.3ID_LINEAR_MOUSE]  81,68 256.5 top
TET183  7  [TETRODE_0.3ID_LINEAR_MOUSE]  81,68 271.5 top
TET184  15  [TETRODE_0.3ID_LINEAR_MOUSE]  81,68 88.5 top
TET185  14  [TETRODE_0.3ID_LINEAR_MOUSE]  81,68 73.5 top
TET186  13  [TETRODE_0.3ID_LINEAR_MOUSE]  81,68 58.5 top
TET187  12  [TETRODE_0.3ID_LINEAR_MOUSE]  81,68 31.5 bottom
TET188  11  [TETRODE_0.3ID_LINEAR_MOUSE]  81,68 46.5 bottom
TET189  10  [TETRODE_0.3ID_LINEAR_MOUSE]  81,68 61.5 bottom
TET190  9  [TETRODE_0.3ID_LINEAR_MOUSE]  81,68 76.5 bottom
TET191  8  [TETRODE_0.3ID_LINEAR_MOUSE]  81,68 91.5 bottom
TET192  0  [TETRODE_0.3ID_LINEAR_MOUSE]  21,91 268.5 bottom
TET193  1  [TETRODE_0.3ID_LINEAR_MOUSE]  21,91 253.5 bottom
TET194  2  [TETRODE_0.3ID_LINEAR_MOUSE]  21,91 238.5 bottom
TET195  3  [TETRODE_0.3ID_LINEAR_MOUSE]  21,91 211.5 top
TET196  4  [TETRODE_0.3ID_LINEAR_MOUSE]  21,91 226.5 top
TET197  5  [TETRODE_0.3ID_LINEAR_MOUSE]  21,91 241.5 top
TET198  6  [TETRODE_0.3ID_LINEAR_MOUSE]  21,91 256.5 top
TET199  7  [TETRODE_0.3ID_LINEAR_MOUSE]  21,91 271.5 top
TET200  15  [TETRODE_0.3ID_LINEAR_MOUSE]  21,91 88.5 top
TET201  14  [TETRODE_0.3ID_LINEAR_MOUSE]  21,91 73.5 top
TET202  13  [TETRODE_0.3ID_LINEAR_MOUSE]  21,91 58.5 top
TET203  12  [TETRODE_0.3ID_LINEAR_MOUSE]  21,91 31.5 bottom
TET204  11  [TETRODE_0.3ID_LINEAR_MOUSE]  21,91 46.5 bottom
TET205  10  [TETRODE_0.3ID_LINEAR_MOUSE]  21,91 61.5 bottom
TET206  9  [TETRODE_0.3ID_LINEAR_MOUSE]  21,91 76.5 bottom
TET207  8  [TETRODE_0.3ID_LINEAR_MOUSE]  21,91 91.5 bottom
TET208  0  [TETRODE_0.3ID_LINEAR_MOUSE]  41,91 268.5 bottom
TET209  1  [TETRODE_0.3ID_LINEAR_MOUSE]  41,91 253.5 bottom
TET210  2  [TETRODE_0.3ID_LINEAR_MOUSE]  41,91 238.5 bottom
TET211  3  [TETRODE_0.3ID_LINEAR_MOUSE]  41,91 211.5 top
TET212  4  [TETRODE_0.3ID_LINEAR_MOUSE]  41,91 226.5 top
TET213  5  [TETRODE_0.3ID_LINEAR_MOUSE]  41,91 241.5 top
TET214  6  [TETRODE_0.3ID_LINEAR_MOUSE]  41,91 256.5 top
TET215  7  [TETRODE_0.3ID_LINEAR_MOUSE]  41,91 271.5 top
TET216  15  [TETRODE_0.3ID_LINEAR_MOUSE]  41,91 88.5 top
TET217  14  [TETRODE_0.3ID_LINEAR_MOUSE]  41,91 73.5 top
TET218  13  [TETRODE_0.3ID_LINEAR_MOUSE]  41,91 58.5 top
TET219  12  [TETRODE_0.3ID_LINEAR_MOUSE]  41,91 31.5 bottom
TET220  11  [TETRODE_0.3ID_LINEAR_MOUSE]  41,91 46.5 bottom
TET221  10  [TETRODE_0.3ID_LINEAR_MOUSE]  41,91 61.5 bottom
TET222  9  [TETRODE_0.3ID_LINEAR_MOUSE]  41,91 76.5 bottom
TET223  8  [TETRODE_0.3ID_LINEAR_MOUSE]  41,91 91.5 bottom
TET224  0  [TETRODE_0.3ID_LINEAR_MOUSE]  61,91 268.5 bottom
TET225  1  [TETRODE_0.3ID_LINEAR_MOUSE]  61,91 253.5 bottom
TET226  2  [TETRODE_0.3ID_LINEAR_MOUSE]  61,91 238.5 bottom
TET227  3  [TETRODE_0.3ID_LINEAR_MOUSE]  61,91 211.5 top
TET228  4  [TETRODE_0.3ID_LINEAR_MOUSE]  61,91 226.5 top
TET229  5  [TETRODE_0.3ID_LINEAR_MOUSE]  61,91 241.5 top
TET230  6  [TETRODE_0.3ID_LINEAR_MOUSE]  61,91 256.5 top
TET231  7  [TETRODE_0.3ID_LINEAR_MOUSE]  61,91 271.5 top
TET232  15  [TETRODE_0.3ID_LINEAR_MOUSE]  61,91 88.5 top
TET233  14  [TETRODE_0.3ID_LINEAR_MOUSE]  61,91 73.5 top
TET234  13  [TETRODE_0.3ID_LINEAR_MOUSE]  61,91 58.5 top
TET235  12  [TETRODE_0.3ID_LINEAR_MOUSE]  61,91 31.5 bottom
TET236  11  [TETRODE_0.3ID_LINEAR_MOUSE]  61,91 46.5 bottom
TET237  10  [TETRODE_0.3ID_LINEAR_MOUSE]  61,91 61.5 bottom
TET238  9  [TETRODE_0.3ID_LINEAR_MOUSE]  61,91 76.5 bottom
TET239  8  [TETRODE_0.3ID_LINEAR_MOUSE]  61,91 91.5 bottom
TET240  0  [TETRODE_0.3ID_LINEAR_MOUSE]  81,91 268.5 bottom
TET241  1  [TETRODE_0.3ID_LINEAR_MOUSE]  81,91 253.5 bottom
TET242  2  [TETRODE_0.3ID_LINEAR_MOUSE]  81,91 238.5 bottom
TET243  3  [TETRODE_0.3ID_LINEAR_MOUSE]  81,91 211.5 top
TET244  4  [TETRODE_0.3ID_LINEAR_MOUSE]  81,91 226.5 top
TET245  5  [TETRODE_0.3ID_LINEAR_MOUSE]  81,91 241.5 top
TET246  6  [TETRODE_0.3ID_LINEAR_MOUSE]  81,91 256.5 top
TET247  7  [TETRODE_0.3ID_LINEAR_MOUSE]  81,91 271.5 top
TET248  15  [TETRODE_0.3ID_LINEAR_MOUSE]  81,91 88.5 top
TET249  14  [TETRODE_0.3ID_LINEAR_MOUSE]  81,91 73.5 top
TET250  13  [TETRODE_0.3ID_LINEAR_MOUSE]  81,91 58.5 top
TET251  12  [TETRODE_0.3ID_LINEAR_MOUSE]  81,91 31.5 bottom
TET252  11  [TETRODE_0.3ID_LINEAR_MOUSE]  81,91 46.5 bottom
TET253  10  [TETRODE_0.3ID_LINEAR_MOUSE]  81,91 61.5 bottom
TET254  9  [TETRODE_0.3ID_LINEAR_MOUSE]  81,91 76.5 bottom
TET255  8  [TETRODE_0.3ID_LINEAR_MOUSE]  81,91 91.5 bottom

## Library data of the parts
AN AN1-AN15 CAT0 CAT1-CAT31 ESTIM ESTIM1-ESTIM15 GND0 GND1-GND31 J1-J16 REF REF1-REF15 SHLD_A SHLD_A1-SHLD_A15 TET0 TET1-TET255 = jonnew
E$1 E$2 E$4 = fiducial